# Altium PCB data_bridge.PcbDoc
Units mm, origin at the board's own origin, x right, y up, seen from the top; angles counter-clockwise.
Board outline 12.5 x 36 mm, 2 copper layers (Top Layer, Bottom Layer); 27 components, 21 nets, 120 pads, 20 vias.
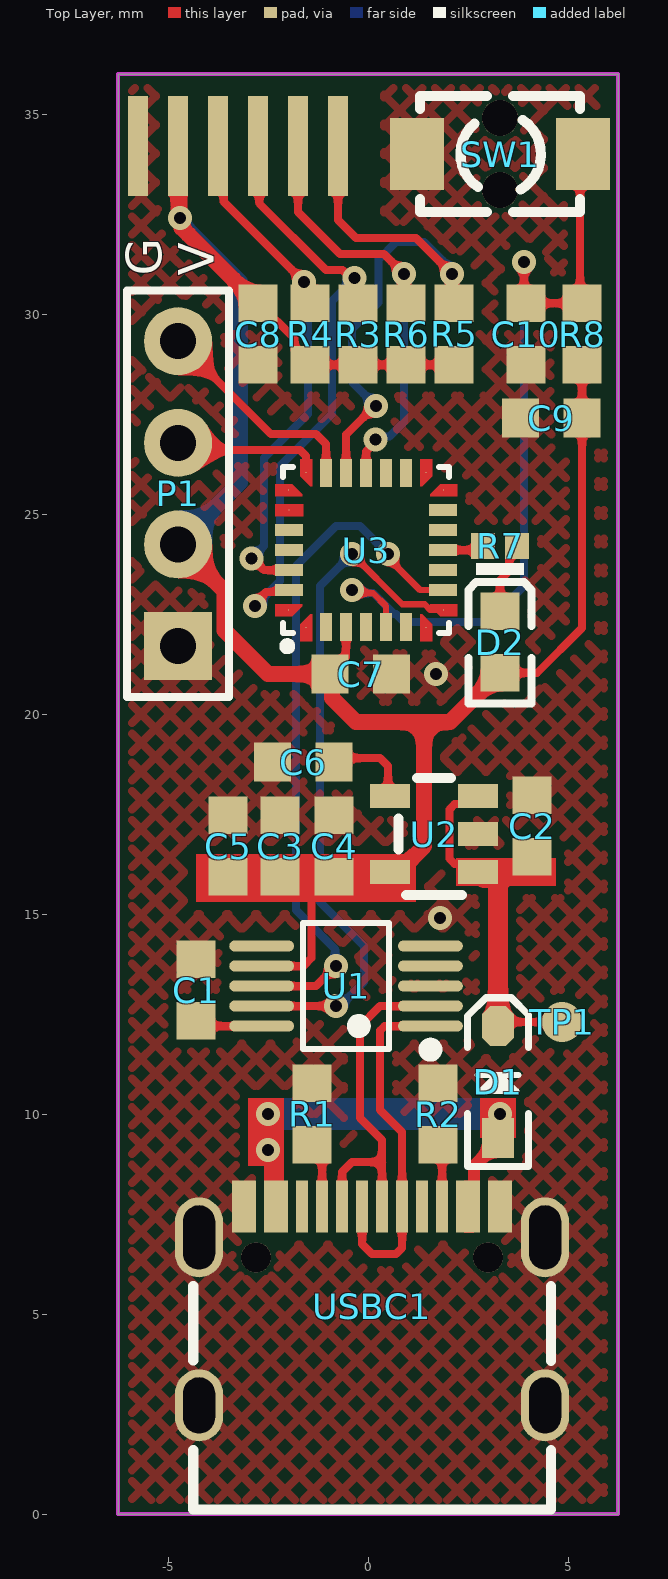
[diagram p0: Top Layer view]
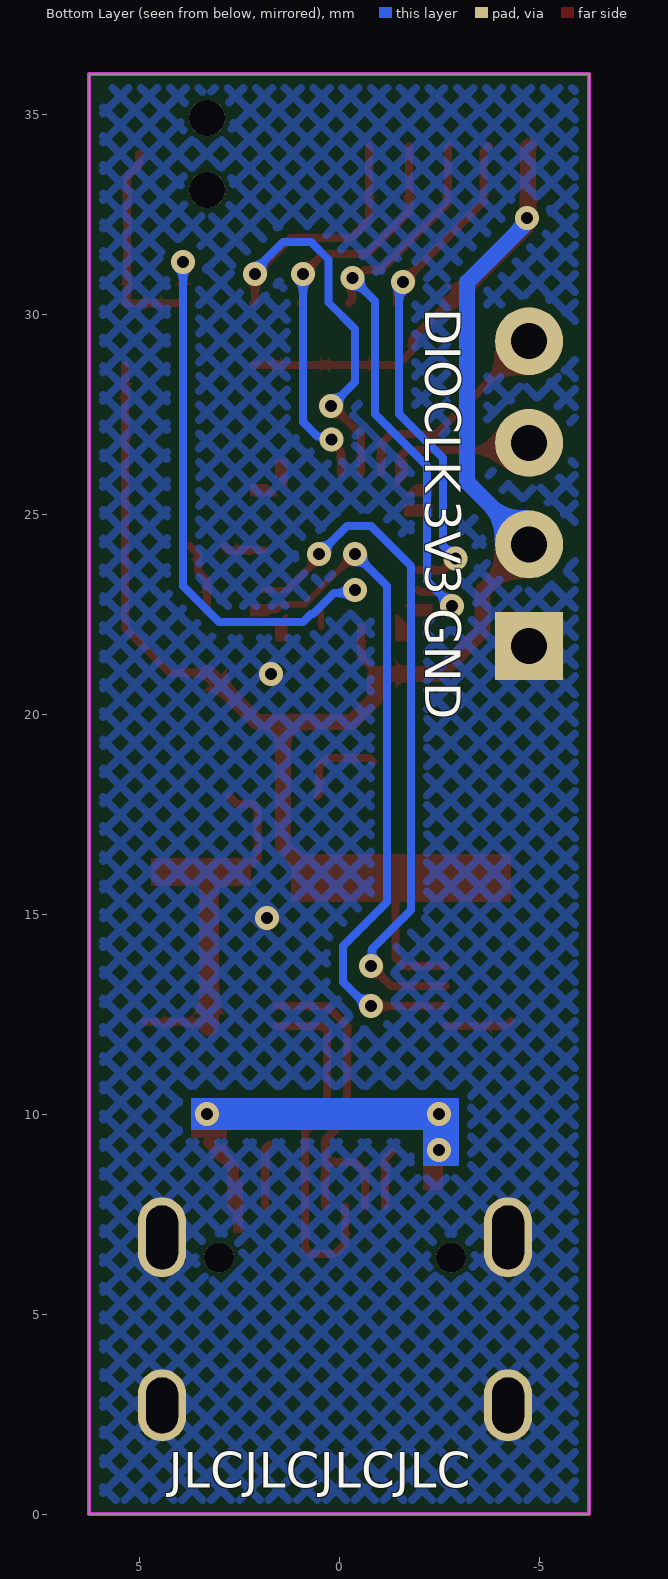
[diagram p1: Bottom Layer view, seen from below]

## Layer stack, top to bottom
Top Solder: solder mask 0.0102, Solder Resist, Dk 3.5
Top Layer: signal copper 0.0356
Dielectric 1: dielectric 0.32, FR-4, Dk 4.8
Bottom Layer: signal copper 0.0356
Bottom Solder: solder mask 0.0102, Solder Resist, Dk 3.5

## Board outline
-6.25,0 -6.25,36 6.25,36 6.25,0

## Design rules (kind name [scope] priority, off if disabled: settings)
Clearance [All] p1: gap=0.2 ignorepadtopadclearanceinfootprint=TRUE except(0.117: Arc-Arc Arc-Track Arc-SMDPad Arc-THPad Arc-Text Arc-Hole Track-Track Track-SMDPad Track-THPad Track-Text Track-Hole SMDPad-SMDPad SMDPad-THPad SMDPad-Text SMDPad-Hole THPad-THPad THPad-Text THPad-Hole Fill-Text Fill-Hole Poly-Text Poly-Hole Region-Text Region-Hole Text-Text Text-Hole)
HoleSize [All] p1: absolutevalues=TRUE maxlimit=5 minlimit=0.025 maxpercent=80.000 minpercent=20.000
MinimumSolderMaskSliver [All] p1: minsoldermaskwidth=0
PolygonConnect [All] p1: connectstyle=Direct reliefconductorwidth=0.254 reliefentries=4 polygonreliefangle="90 Angle" airgapwidth=0.254
RoutingVias [All] p1: holewidth=0.3 width=0.6 viastyle="Through Hole" minholewidth=0.3 minwidth=0.6 maxholewidth=0.3 maxwidth=0.6
SilkToSilkClearance [All] p1: silktosilkclearance=0
SilkToSolderMaskClearance [IsPad] p1: minsilkscreentomaskgap=0 clearancetoexposedcopper=TRUE
SolderMaskExpansion [All] p1: expansion=0.102 istentingtop=FALSE
SupplyNets "Schematic Supply Nets_4" [InNet('VBUS_USB')] p1: voltage=0.000
SupplyNets "Schematic Supply Nets_3" [InNet('GND')] p2: voltage=0.000
SupplyNets "Schematic Supply Nets_2" [InNet('SYS_PP5V')] p3: voltage=0.000
SupplyNets "Schematic Supply Nets" [InNet('VCC_PP3V3_SYS')] p4: voltage=0.000
Width [All] p1: maxlimit=1 minlimit=0.102 preferedwidth=0.2
26 further rules are at their usual default settings.

## Components (designator, comment, footprint, x,y, rotation, side; value= is the part's Value field where it differs from the comment)
C1 "100nF (104) 10% 50V" LC-0603_C_NOSILK -4.3,13.1 r90 top
C2 "22uF (226) 20% 6.3V" LC-0603_C_NOSILK 4.1,17.2 r270 top
C3 "22uF (226) 20% 6.3V" LC-0603_C_NOSILK -2.2,16.7 r270 top
C4 "22uF (226) 20% 6.3V" LC-0603_C_NOSILK -0.85,16.7 r270 top
C5 "22uF (226) 20% 6.3V" LC-0603_C_NOSILK -3.5,16.7 r270 top
C6 "10nF (103) 10% 50V" LC-0603_C_NOSILK -1.62,18.8 r0 top
C7 "100nF (104) 10% 50V" LC-0603_C_NOSILK -0.18,21 r180 top
C8 "100nF (104) 10% 50V" LC-0603_C_NOSILK -2.75,29.5 r90 top
C9 "100nF (104) 10% 50V" LC-0603_C_NOSILK 4.58,27.4 r0 top
C10 "100nF (104) 10% 50V" LC-0603_C_NOSILK 3.95,29.5 r90 top
D1 "1N5819" SOD-323 3.25,10.8 r90 top
D2 "白灯 0603" LC-0603_LED_S1 3.3,21.8 r270 top
P1 "Header 4" HDR2.54-LI-4P -4.75,25.51 r90 top
R1 "5.1KΩ (5101) ±1%" LC-0603_R_NOSILK -1.4,10 r270 top
R2 "5.1KΩ (5101) ±1%" LC-0603_R_NOSILK 1.75,10 r270 top
R3 "4.7KΩ (4701) ±1%" LC-0603_R_NOSILK -0.25,29.5 r270 top
R4 "4.7KΩ (4701) ±1%" LC-0603_R_NOSILK -1.45,29.5 r270 top
R5 "4.7KΩ (4701) ±1%" LC-0603_R_NOSILK 2.15,29.5 r270 top
R6 "4.7KΩ (4701) ±1%" LC-0603_R_NOSILK 0.95,29.5 r270 top
R7 "1KΩ (1001) ±1%" LC-0402_R_NOSILK 3.3,24.2 r180 top
R8 "10KΩ (1002) ±1%" LC-0603_R_NOSILK 5.35,29.5 r270 top
SW1 "TSA343G00D-250J2" SW-SMD_L4.0-W2.9-P4.15-EH 3.3,34 r180 top
TP1 "TEST" "TEST 1" 4.85,12.3 r90 top
U1 "CH340E" MSOP-10_L3.0-W3.0-P0.50-LS5.0-BL -0.55,13.2 r90 top
U2 "SPX3819M5-3.3" SOT-23-5_L2.9-W1.6-P0.95-LS2.8-BL 1.65,17 r90 top
U3 "STM32G031G8U6" UFQFPN-28_L4.0-W4.0-P0.50-BL -0.05,24.1 r0 top
USBC1 "TYPE-C-31-M-12" USB-C_SMD-TYPE-C-31-M-12 0.1,5.2 r0 top

## Footprints (in the part's own frame and the unit in brackets; to place one, negate y for a bottom-side part, rotate by r counter-clockwise, add the part's x,y. Pads: shape width x height; smd on the part's side, far side on the other; paste and mask are expansions set on the pad)
HDR2.54-LI-4P [mm] "排针，4脚"
  rect 1.7x1.7 hole 0.9: 1(-3.81,0)
  round 1.7 hole 0.9: 2(-1.27,0) 3(1.27,0) 4(3.81,0)
  silkscreen extent -5.08,-1.27 5.08,1.27, body extent -5.08,-1.27 5.08,1.27, height 8.5
LC-0402_R_NOSILK [mm]
  rect 0.6x0.65 smd mask+0.051: 1(-0.425,0) 2(0.425,0)
  body extent -0.57,-0.27 0.58,0.28, height 0.41
LC-0603_C_NOSILK [mm]
  rect 0.93x0.98 smd: 1(-0.77,0) 2(0.77,0)
  body extent -0.8,-0.4 0.8,0.4, height 0.3
LC-0603_LED_S1 [mm]
  rect 0.93x0.98 smd: A(0.77,0) K(-0.77,0)
  silkscreen extent -1.98,-0.79 1.54,0.79, body extent -0.8,-0.4 0.8,0.4, height 0.6
LC-0603_R_NOSILK [mm]
  rect 0.93x0.98 smd: 1(-0.77,0) 2(0.77,0)
  body extent -0.85,-0.4 0.85,0.4, height 0.56
MSOP-10_L3.0-W3.0-P0.50-LS5.0-BL [mm]
  oval 0.28x1.62 smd: 1(-1,-2.11) 2(-0.5,-2.11) 3(0,-2.11) 4(0.5,-2.11) 5(1,-2.11) 6(1,2.11) 7(0.5,2.11) 8(0,2.11) 9(-0.5,2.11) 10(-1,2.11)
  silkscreen extent -1.74,-2.26 1.58,1.07, body extent -1.5,-2.44 1.5,2.59, height 1.05
SOD-323 [mm] "1.8x1.3X0.9mm（长宽高，不包括引脚）"
  rect 1x0.8 smd: 1(-1.4,0)
  oct 1x0.8 smd: 2(1.4,0)
  silkscreen extent -2.11,-0.76 2.11,0.76, body extent -1.34,-0.63 1.31,0.67, height 1
SOT-23-5_L2.9-W1.6-P0.95-LS2.8-BL [mm]
  rect 0.6x1 smd: 1(-0.95,-1.1) 2(0,-1.1) 3(0.95,-1.1) 4(0.95,1.1) 5(-0.95,1.1)
  silkscreen extent -1.52,-0.7 1.4,0.89, body extent -1.47,-1.25 1.53,1.25, height 1.01
SW-SMD_L4.0-W2.9-P4.15-EH [mm]
  rect 1.35x1.8 smd: 1(-2.075,0) 2(2.075,0)
  round 0.9 hole 0.9 unplated: ""(0,0.9) ""(0,-0.9)
  silkscreen extent -2,-1.45 2,1.45
"TEST 1" [mm] "测试点1mm"
  round 1 smd paste-1: 1(0,0)
UFQFPN-28_L4.0-W4.0-P0.50-BL [mm]
  round 0.025 smd mask+0.051: 1(-1.5,-1.937) 7(1.5,-1.938) 8(1.937,-1.5) 14(1.938,1.5) 15(1.5,1.937) 21(-1.5,1.938) 22(-1.937,1.5) 23(-1.925,1) 28(-1.938,-1.5)
  rect 0.3x0.7 smd paste+0 mask+0.051: 2(-1,-1.925) 3(-0.5,-1.925) 4(0,-1.925) 5(0.5,-1.925) 6(1,-1.925) 16(1,1.925) 17(0.5,1.925) 18(0,1.925) 19(-0.5,1.925) 20(-1,1.925)
  rect 0.7x0.3 smd paste+0 mask+0.051: 9(1.925,-1) 10(1.925,-0.5) 11(1.925,0) 12(1.925,0.5) 13(1.925,1) 24(-1.925,0.5) 25(-1.925,0) 26(-1.925,-0.5) 27(-1.925,-1)
  Top Layer region: -1.85,1.65 -2.275,1.65 -2.275,1.35 -1.6,1.35 -1.6,1.4
  Top Layer region: -2.275,1.15 -1.575,1.15 -1.575,0.85 -2.275,0.85
  Top Layer region: -1.65,1.85 -1.65,2.275 -1.35,2.275 -1.35,1.6 -1.4,1.6
  Top Layer region: -1.85,-1.65 -2.275,-1.65 -2.275,-1.35 -1.6,-1.35 -1.6,-1.4
  Top Layer region: -1.65,-1.85 -1.65,-2.275 -1.35,-2.275 -1.35,-1.6 -1.4,-1.6
  Top Layer region: 1.85,-1.65 2.275,-1.65 2.275,-1.35 1.6,-1.35 1.6,-1.4
  Top Layer region: 1.65,-1.85 1.65,-2.275 1.35,-2.275 1.35,-1.6 1.4,-1.6
  Top Layer region: 1.85,1.65 2.275,1.65 2.275,1.35 1.6,1.35 1.6,1.4
  Top Layer region: 1.65,1.85 1.65,2.275 1.35,2.275 1.35,1.6 1.4,1.6
  silkscreen extent -2.08,-2.51 2.08,2.08, body extent -2.01,-2.01 2.01,2.01, height 0.61
USB-C_SMD-TYPE-C-31-M-12 [mm]
  oval 1.2x2 hole 0.8 slot 1.6 at 90 deg: 0(-4.325,1.716) 1(4.325,1.716)
  oval 1.2x1.8 hole 0.8 slot 1.4 at 90 deg: 2(4.325,-2.484) 3(-4.325,-2.484)
  rect 0.3x1.3 smd: A1(-3.35,2.484) A4(-2.55,2.484) A5(-1.25,2.484) A6(-0.25,2.484) A7(0.25,2.484) A8(1.25,2.484) A9(2.55,2.484) A12(3.35,2.484) B1(3.05,2.484) B4(2.25,2.484) B5(1.75,2.484) B6(0.75,2.484) B7(-0.75,2.484) B8(-1.75,2.484) B9(-2.25,2.484) B12(-3.05,2.484)
  round 0.75 hole 0.75 unplated: ""(-2.9,1.216) ""(2.9,1.216)
  silkscreen extent -4.47,-5.08 4.47,0.5, body extent -4.47,-5.08 4.47,2.82, height 3.26

## Part data
C1 C7 C8 C9 C10: library part "0603 100nF (104) 10% 50V", "贴片电容", Package=0603, SuppliersPartNumber=C14663, ComponentLink1Description=供应商链接, ComponentLink1URL=http://www.szlcsc.com/product/details_15331.html, Supplier=LC
C2 C3 C4 C5: library part "0603 22uF (226) 20% 6.3V", "贴片电容", Package=0603, SuppliersPartNumber=C59461, ComponentLink1Description=供应商链接, ComponentLink1URL=http://www.szlcsc.com/product/details_60514.html, Supplier=LC
C6: library part "0603 10nF (103) 10% 50V", "贴片电容", Package=0603, SuppliersPartNumber=C57112, ComponentLink1Description=供应商链接, ComponentLink1URL=http://www.szlcsc.com/product/details_58143.html, Supplier=LC
D1: "肖特基二极管", BOM名称=肖特基二极管, 学习资源=www.ooocke.com, 属性=40V/2A, 版权归属=源创客
D2: library part "0603 白灯", "发光二极管", Package=0603, SuppliersPartNumber=C2290, ComponentLink1Description=供应商链接, ComponentLink1URL=http://www.szlcsc.com/product/details_2663.html, Supplier=LC
P1: "Header, 4-Pin", LatestRevisionDate=17-Jul-2002, LatestRevisionNote="Re-released for DXP Platform.", Publisher="Altium Limited"
R1 R2: library part "0603 5.1KΩ (5101) 1%", "贴片电阻", Package=0603, SuppliersPartNumber=C23186, ComponentLink1Description=供应商链接, ComponentLink1URL=http://www.szlcsc.com/product/details_23913.html, Supplier=LC
R3 R4 R5 R6: library part "0603 4.7KΩ (4701) 1%", "贴片电阻", Package=0603, SuppliersPartNumber=C23162, ComponentLink1Description=供应商链接, ComponentLink1URL=http://www.szlcsc.com/product/details_23889.html, Supplier=LC
R7: library part "0402 1KΩ (1001) 1%", "贴片电阻", Package=0402, SuppliersPartNumber=C11702, ComponentLink1Description=供应商链接, ComponentLink1URL=http://www.szlcsc.com/product/details_12256.html, Supplier=LC
R8: library part "0603 10KΩ (1002) 1%", "贴片电阻", Package=0603, SuppliersPartNumber=C25804, ComponentLink1Description=供应商链接, ComponentLink1URL=http://www.szlcsc.com/product/details_26547.html, Supplier=LC
SW1: "龟仔开关", BOM_Manufacturer=BRIGHT, BOM_Manufacturer Part=TSA343G00D-250J2, BOM_Supplier=LCSC, BOM_Supplier Part=C354947, Contributor=LCSC, spicePre=S, spiceSymbolName=TSA343G00D-250J2
TP1: "测试点", BOM名称=测试点, 学习资源=www.ooocke.com, 版权归属=源创客
U1: "ttl-usb芯片", BOM_JLCPCB Part Class="Extended Part", BOM_Manufacturer=WCH(南京沁恒), BOM_Manufacturer Part=CH340E, BOM_Supplier=LCSC, BOM_Supplier Part=C99652, spicePre=U, spiceSymbolName=CH340E
U2: "Vin=16V Vout=3.3V 500mA LDO", BOM_JLCPCB Part Class="Extended Part", BOM_Manufacturer=null, BOM_Manufacturer Part=SPX3819M5-3.3, BOM_Supplier=LCSC, BOM_Supplier Part=C9900018941, Contributor=lcsc, spicePre=U, spiceSymbolName=SPX3819M5-3.3
U3: "主流Arm Cortex-M0+ MCU，具有64 KB Flash存储器、8 KB RAM、64 MHz CPU、2x USART、定时器、ADC和通信接口，1.7-3.6V", JLCPCB Part Class="Extended Part", Manufacturer=ST(意法半导体), Contributor=LCSC, Manufacturer Part=STM32G031G8U6, spicePre=U, spiceSymbolName=STM32G031G8U6, Supplier=LCSC, Supplier Part=C432211
USBC1: "贴片type-c母座", BOM_JLCPCB Part Class="Extended Part", BOM_Manufacturer=韩国韩荣, BOM_Manufacturer Part=TYPE-C-31-M-12, BOM_Supplier=LCSC, BOM_Supplier Part=C165948, Contributor=LCSC, spicePre=U, spiceSymbolName=TYPE-C-31-M-12

## Free pads (board coordinates)
  rect 0.5x2.5 smd: 1(-5.75,34.2) 1(-4.75,34.2) 1(-3.75,34.2) 1(-2.75,34.2) 1(-1.75,34.2) 1(-0.75,34.2)

## Via types
v1: diameter 0.6, hole 0.3, Top Layer to Bottom Layer, tented both sides, 20 vias

## Nets (pads, with @x,y where several pads share a name; then routed paths per layer and width w, separated by ;. In a path a pad name is that pad's centre, name@x,y a point inside that pad or via, vN(x,y) a via of type N, cw(c..) or ccw(c..) an arc to the next point about the centre after c; other vN are vias at no path point)
GND: C1.2 C2.1 C3.1 C4.1 C5.1 C6.1 C7.1 C8.1 C9.1 C10.1 P1.1 pad.1@-5.75,34.2 R1.1 R2.1 SW1.2 U1.3 U2.2 U3.4 USBC1.0 USBC1.1 USBC1.2 USBC1.3 USBC1.A1 USBC1.A12 USBC1.B1 USBC1.B12
  other v1: 1.8,14.9 1.7,21
I2C1_SCL: pad.1@-3.75,34.2 R4.1 U3.26 | length 13.5
  Top Layer w0.2: pad.1@-3.75,34.2 -3.613,34.063 -3.613,32.813 -1.45,30.65 R4.1 ; v1(-2.911,23.889) -2.889,23.889 -2.6,23.6 U3.26
  Bottom Layer w0.2: v1(-2.911,23.889) -2.911,23.895 -2.6,24.206 -2.6,26.4 -1.5,27.5 -1.5,30.7 v1(-1.6,30.8)
I2C1_SDA: pad.1@-2.75,34.2 R3.1 U3.27 | length 15.6
  Top Layer w0.2: v1(-2.825,22.7) -2.8,22.725 -2.8,22.8 -2.55,23.05 -2.025,23.05 U3.27 ; pad.1@-2.75,34.2 -2.719,34.169 -2.719,32.767 -1.051,31.1 -0.642,31.1 -0.577,31.035 -0.468,31.035 -0.342,30.909 v1(-0.342,30.9) ; v1@-0.275,30.9 -0.275,30.765 -0.325,30.715 -0.325,30.345 R3.1
  Bottom Layer w0.2: v1(-2.825,22.7) -2.2,23.325 -2.2,26.2 -0.9,27.5 -0.9,30.325 -0.342,30.883 v1(-0.342,30.9)
I2C2_SCL: pad.1@-1.75,34.2 R6.1 U3.18 | length 11.2
  Top Layer w0.2: pad.1@-1.75,34.2 -1.75,32.55 -0.7,31.5 0.4,31.5 v1(0.9,31) 0.9,30.32 R6.1 ; U3.18 -0.05,26.56 0.185,26.795 v1(0.185,26.862)
  Bottom Layer w0.2: v1(0.185,26.862) 0.262,26.938 0.538,26.938 0.9,27.3 v1(0.9,31)
I2C2_SDA: pad.1@-0.75,34.2 R5.1 U3.19 | length 14.6
  Top Layer w0.2: pad.1@-0.75,34.2 -0.75,32.35 -0.3,31.9 1.2,31.9 v1(2.1,31) 2.1,30.32 R5.1 ; U3.19 -0.55,26.984 0.166,27.7 v1(0.2,27.7)
  Bottom Layer w0.2: v1(0.2,27.7) -0.4,28.3 -0.4,29.625 0.258,30.283 0.258,31.358 0.7,31.8 1.4,31.8 2.1,31.1 v1(2.1,31)
NetC1_1: C1.1 U1.10 | length 1.7
  Top Layer w0.2: C1.1 -4.17,12.2 U1.10
NetC6_2: C6.2 U2.4 | length 2.2
  Top Layer w0.2: C6.2 -0.75,18.9 0.3,18.9 0.5,18.7 0.5,18 U2.4
NetD2_K: D2.K R7.1 | length 1.8
  Top Layer w0.2: D2.K 3.3,23.342 3.525,23.567 3.525,24 R7.1
NetR1_2: R1.2 USBC1.A5 | length 1.5
  Top Layer w0.2: R1.2@-1.33,9.06 -1.15,8.88 USBC1.A5
NetR2_2: R2.2 USBC1.B5 | length 1.6
  Top Layer w0.2: R2.2 1.85,9.13 USBC1.B5
NetR7_2: R7.2 U3.11 | length 1
  Top Layer w0.2: U3.11 2.775,24.1 R7.2
NetU1_1: U1.1 USBC1.A6 USBC1.B6 | length 9.1
  Top Layer w0.2: USBC1.A6 -0.15,6.75 0.1,6.5 0.7,6.5 0.85,6.65 USBC1.B6 0.85,9.55 0.3,10.1 0.3,12.083 0.417,12.2 U1.1
NetU1_2: U1.2 USBC1.A7 USBC1.B7 | length 8.7
  Top Layer w0.2: USBC1.B7 -0.65,8.55 -0.4,8.8 0.35,8.8 ; USBC1.A7 0.35,8.8 ; U1.2 0.3,12.7 -0.217,12.183 -0.217,12.017 -0.2,12 -0.2,9.9 0.35,9.35 0.35,8.8
SYS_JTMS-SWCLK: P1.3 U3.21 | length 3.7
  Top Layer w0.2: P1.3 -4.57,26.6 -1.7,26.6 -1.55,26.45 U3.21
SYS_JTMS-SWDIO: P1.4 U3.20 | length 5.5
  Top Layer w0.2: P1.4 -2.43,27 -1.3,27 -1.05,26.75 U3.20
SYS_NRST: C10.2 R8.1 SW1.1 U3.5 | length 21
  Top Layer w0.16: v1(-0.4,23.1) -0.323,23.023 0.128,23.023 0.45,22.701 U3.5
  Top Layer w0.2: v1(3.9,31.3) 3.9,30.32 C10.2 R8.1 5.3,30.32 5.3,33.425 5,33.725 SW1.1@5,34
  Bottom Layer w0.2: v1(-0.4,23.1) -0.323,23.023 0.128,23.023 0.651,22.5 0.7,22.5 0.9,22.3 3,22.3 3.9,23.2 v1(3.9,31.3)
SYS_PP5V: C2.2 D1.2 TP1.1 U2.1 U2.3 | length 9.1
  Top Layer w0.2: U2.1 2.55,16.25 2.167,16.25 2.033,16.384 2.033,17.616 2.167,17.75 2.55,17.75 U2.3 ; D1.2 3.35,12.3 TP1.1
  Top Layer w0.5: U2.1 2.9,15.9 3.4,15.9 3.25,15.75 D1.2
USART2_RX: U1.8 U3.9 | length 17.3
  Top Layer w0.16: v1(0.5,24) 0.5,23.9 1.3,23.1 U3.9
  Top Layer w0.2: U1.8 -1.3,13.2 v1(-0.8,13.7)
  Bottom Layer w0.2: v1(-0.8,13.7) -0.824,13.724 -0.824,14.124 -1.8,15.1 -1.8,23.7 -0.8,24.7 -0.2,24.7 v1(0.5,24)
USART2_TX: U1.9 U3.8 | length 17.2
  Top Layer w0.16: v1(-0.4,24) 0.858,22.742 1.415,22.742 1.557,22.6 U3.8
  Top Layer w0.2: U1.9 v1(-0.8,12.7)
  Bottom Layer w0.2: v1(-0.8,12.7) -0.7,12.7 -0.1,13.3 -0.1,14.2 -1.2,15.3 -1.2,23.2 v1(-0.4,24)
VBUS_USB: D1.1 USBC1.A4 USBC1.A9 USBC1.B4 USBC1.B9 | length 2
  Top Layer w0.2: D1.1@3.25,9.3 D1.1
  Top Layer w0.3: USBC1.A9 2.65,8.7 D1.1@3.25,9.3
  other v1: -2.5,9.1 -2.5,10 3.3,10
VCC_PP3V3_SYS: C3.2 C4.2 C5.2 C7.2 C8.2 C9.2 D2.A P1.2 pad.1@-4.75,34.2 R3.2 R4.2 R5.2 R6.2 R8.2 U1.7 U2.5 U3.3 | length 48.6
  Top Layer w0.2: C8.2 -2.725,30.27 -1.84,29.385 -1.84,29.095 -1.475,28.73 R4.2 R3.2 R6.2 R5.2 ; U1.7 -1.617,13.7 -1.41,13.907 -1.41,15.4 -1.3,15.4 ; C7.2@-0.95,21.025 -0.55,21.425 U3.3 ; D2.A 4.23,21.03 5.35,22.15 C9.2 R8.2
  Top Layer w0.4: P1.2 -3.583,23.073 -3.583,22.083 -2.5,21 C7.2 -0.9,20.95 -0.9,20.4 -0.3,19.8 1.4,19.8 ; pad.1@-4.75,34.2 -4.725,34.175 -4.725,32.425 v1(-4.7,32.4) -4.662,32.362 -4.662,32.157 -2.775,30.27 C8.2 ; U2.5@0.75,16.05 1.4,16.7 1.4,19.8 ; D2.A 3.275,21.03 2.045,19.8 1.4,19.8
  Bottom Layer w0.4: P1.2 -3.2,25.79 -3.2,30.8 -4.7,32.3 v1(-4.7,32.4)
pads on no net: SW1. U1.4 U1.5 U1.6 U3.1 U3.2 U3.6 U3.7 U3.10 U3.12 U3.13 U3.14 U3.15 U3.16 U3.17 U3.22 U3.23 U3.24 U3.25 U3.28 USBC1. USBC1.A8 USBC1.B8

## Polygon pours and split planes (outlines as drawn)
GND on Top Layer "GND_L01_P000" (hatched 45Degree grid 0.508 track 0.203, remove dead copper, pour order 0): -6.25,0 -6.25,36 6.25,36 6.25,0
GND on Bottom Layer "GND_L02_P001" (hatched 45Degree grid 0.508 track 0.203, remove dead copper, pour order 1): -6.25,0 -6.25,36 6.25,36 6.25,0

## Keep-outs
Keep-Out Layer:
  the board outline again, w0.1

## Other copper
Top Layer:
  rectangle net VBUS_USB: 2.4,7.032 2.65,8.334
  rectangle net VCC_PP3V3_SYS: -4.3,15.3 1.2,16.5
  rectangle net SYS_PP5V: 2.2,15.7 4.7,16.4
  rectangle net VBUS_USB: 2.8,9.4 3.7,10.4
  rectangle net VBUS_USB: -2.6,8.1 -2.1,9.1
  rectangle net VBUS_USB: -3,8.7 -2.1,10.4
  pour cut-out: -0.5,36.2 -0.525,36.175 -0.525,32.125 0.375,32.125 0.4,32.1 0.4,36.2
Bottom Layer:
  rectangle net VBUS_USB: -3,8.7 -2.1,9.7
  rectangle net VBUS_USB: -3,9.6 3.7,10.4

## Silkscreen, mask and mechanical layers (free items; w line width, h text height)
Top Overlay:
  text "G" at -5.152,30.952 h0.89 r90
  text "V" at -3.852,30.952 h0.89 r90
Bottom Overlay:
  text "DIO" at -2.152,30.148 h0.89 r90
  text "CLK" at -2.152,27.848 h0.89 r90
  text "3V3" at -2.152,25.348 h0.89 r90
  text "GND" at -2.152,22.648 h0.89 r90
  text "JLCJLCJLCJLC" at 4.258,0.652 h0.89